# Altium PCB Nguon_LM358_PCB.PcbDoc
Units mm, origin at the board's own origin, x right, y up, seen from the top; angles counter-clockwise.
Board outline 123.19 x 49.53 mm, 2 copper layers (Top Layer, Bottom Layer); 29 components, 15 nets, 71 pads, 3 vias.
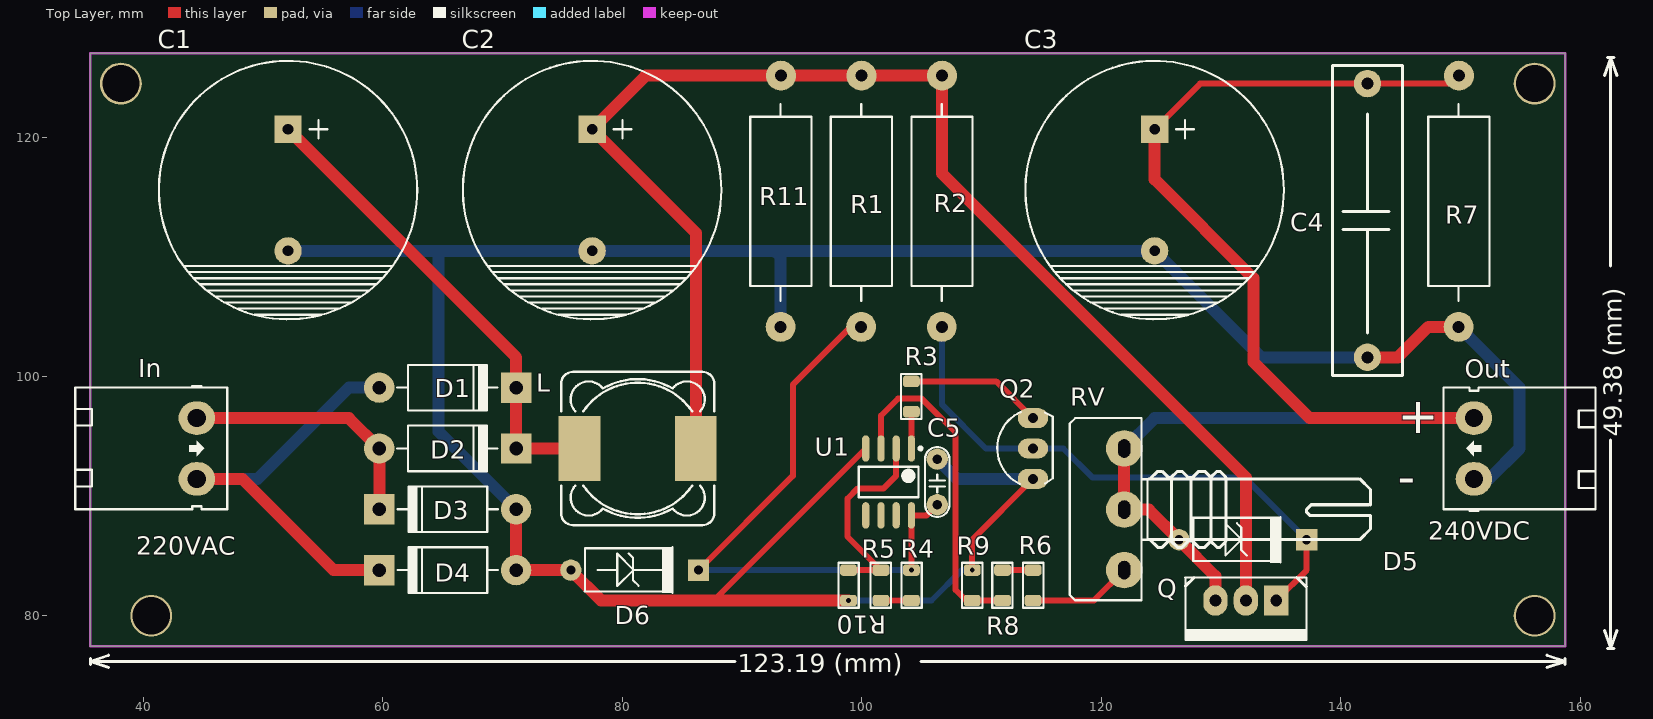
[diagram p0: Top Layer view]
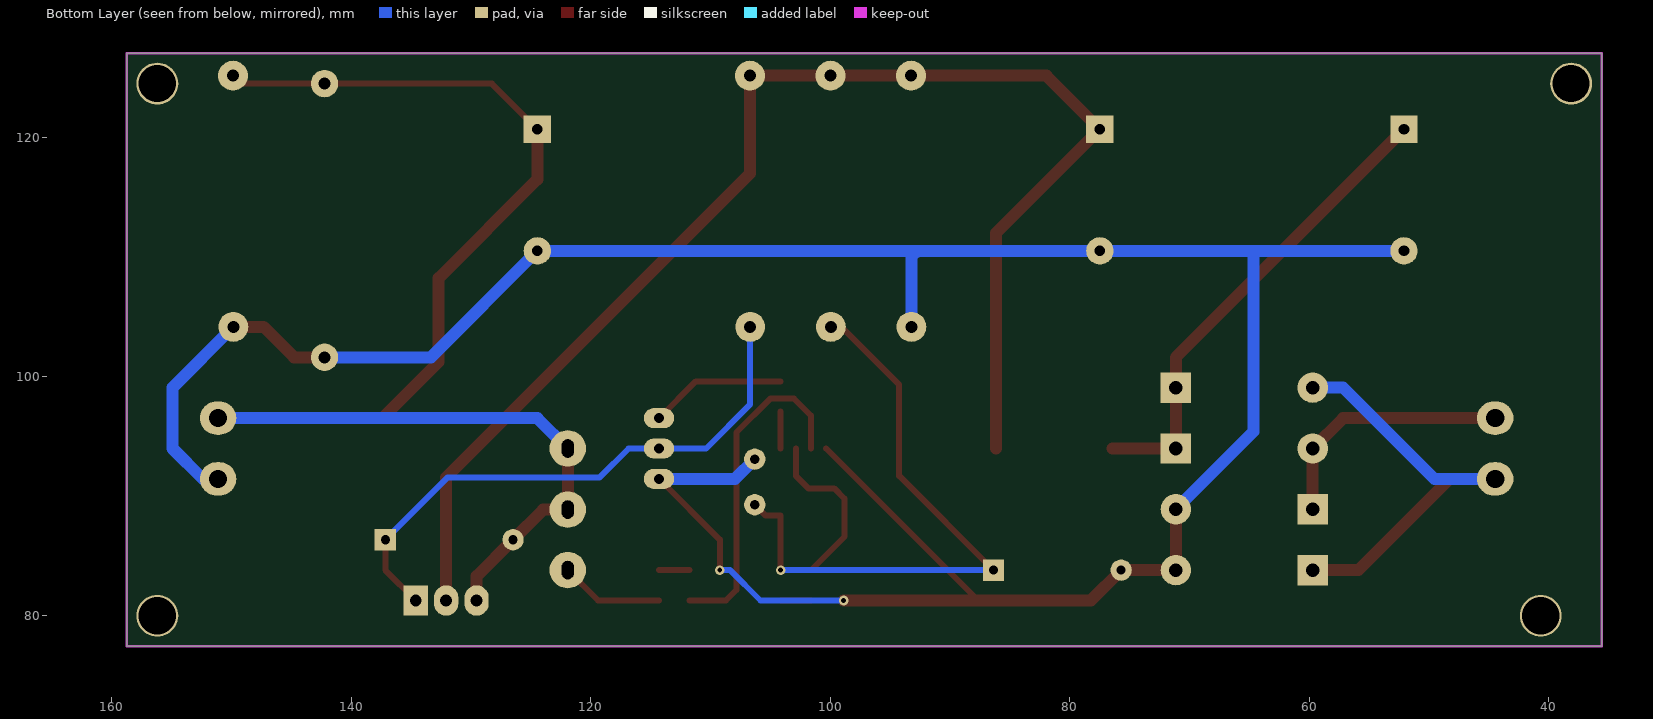
[diagram p1: Bottom Layer view, seen from below]
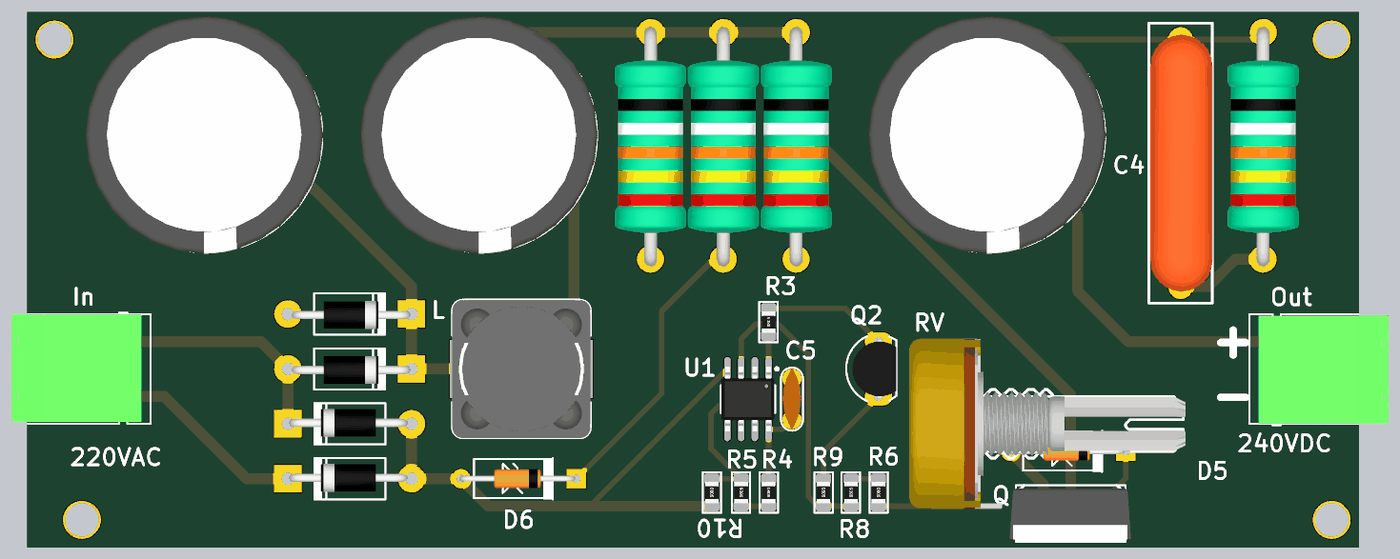
[diagram p2: 3D render of the assembled board from above, using the file's embedded part models]

## Layer stack, top to bottom
Top Solder: solder mask 0.0102, Solder Resist, Dk 3.5
Top Layer: signal copper 0.0356
Dielectric 1: dielectric 0.32, FR-4, Dk 4.8
Bottom Layer: signal copper 0.0356
Bottom Solder: solder mask 0.0102, Solder Resist, Dk 3.5

## Board outline
35.56,77.47 158.75,77.47 158.75,127 35.56,127

## Design rules (kind name [scope] priority, off if disabled: settings)
Clearance [All] p1: gap=0.254 ignorepadtopadclearanceinfootprint=FALSE except(0: Arc-Hole Track-Hole SMDPad-Hole THPad-Hole Via-Hole Fill-Hole Poly-Hole Region-Hole Text-Hole)
PolygonConnect [All] p1: connectstyle=Relief reliefconductorwidth=0.254 reliefentries=4 polygonreliefangle="90 Angle" airgapwidth=0.254
RoutingVias [All] p1: holewidth=0.711 width=1.27 viastyle="Through Hole" minholewidth=0.711 minwidth=1.27 maxholewidth=0.711 maxwidth=1.27
SolderMaskExpansion [All] p1: expansion=0.102
Width [All] p1: maxlimit=2 minlimit=0.254 preferedwidth=0.5
30 further rules are at their usual default settings.

## Components (designator, comment, footprint, x,y, rotation, side; value= is the part's Value field where it differs from the comment)
C1 "Cap Pol" CP4/8.5 52.07,120.65 r270 top value=100pF
C2 "Cap Pol" CP4/8.5 77.47,120.65 r270 top value=100pF
C3 "Cap Pol" CP4/8.5 124.46,120.65 r270 top value=100pF
C4 "0.1uF" "CN - 0.8" 142.24,101.6 r90 top
C5 "Cap" CN1.5 106.299,89.281 r90 top value=105
D1 "Diode" "D2A diode" 71.12,99.06 r180 top
D2 "Diode" "D2A diode" 71.12,93.98 r180 top
D3 "Diode" "D2A diode" 59.69,88.9 r0 top
D4 "Diode" "D2A diode" 59.69,83.82 r0 top
D5 "15V" "Diode Zener" 126.492,86.36 r180 top
D6 "15V" "Diode Zener" 75.692,83.82 r180 top
In "Header 2" HEAD2T 44.45,96.52 r270 top
L "Inductor" "INDUCTOR 12.5x12.5" 81.28,93.98 r0 top value=10mH
Out "Header 2" HEAD2T 151.13,91.44 r90 top
Q "IRF840" QTO-220 134.62,81.28 r180 top
Q2 "13003" QTO-92 114.3,93.98 r90 top value=C1815
R1 "#NAME?" R2W 99.949,104.14 r90 top
R2 "#NAME?" R2W 106.68,104.14 r90 top
R3 "#NAME?" SM-0805 104.14,98.323 r90 top
R4 "#NAME?" SM-0805 104.14,82.55 r270 top
R5 "#NAME?" SM-0805 101.6,82.55 r90 top
R6 "#NAME?" SM-0805 114.3,82.55 r270 top
R7 "#NAME?" R2W 149.86,104.14 r90 top
R8 "#NAME?" SM-0805 111.76,82.55 r90 top
R9 "#NAME?" SM-0805 109.22,82.55 r270 top
R10 "#NAME?" SM-0805 98.882,82.55 r270 top
R11 "#NAME?" R2W 93.218,104.14 r90 top
RV "10k" "RVar 1" 121.92,83.82 r90 top
U1 "LM358" "SOIC 8N" 104.14,93.98 r270 top

## Footprints (in the part's own frame and the unit in brackets; to place one, negate y for a bottom-side part, rotate by r counter-clockwise, add the part's x,y. Pads: shape width x height; smd on the part's side, far side on the other; paste and mask are expansions set on the pad)
CN1.5 [mil]
  round 70 hole 31: 1(0,0) 2(150,0)
  silkscreen extent -40,-40 190,40, body extent -40,-33 190,33, height 235
"CN - 0.8" [mil] "105uF 400V 800mil"
  round 90 hole 39.37: 1(0,0) 2(900,0)
  silkscreen extent -60,-115 960,115, body extent -18,-116 918,110, height 78
CP4/8.5 [mil] "Tu hoa 4700uF/50V"
  rect 90x90 hole 35: 1(0,0)
  round 90 hole 35: 2(400,0)
  silkscreen extent -225,-425 625,425, body extent -236,-438 630,428, height 984
"D2A diode" [mil] "Diode 2A, W 150mil, L 450mil"
  round 100 hole 45: 1(450,0)
  rect 100x100 hole 45: 2(0,0)
  silkscreen extent 61,-75 391,75, body extent 5,-47 435,54, height 100
"Diode Zener" [mil] "Diode 2A, W 150mil, L 450mil"
  round 70 hole 30: 1(0,0)
  rect 70x70 hole 30: 2(-420,0)
  silkscreen extent -335,-75 -46,75, body extent -415,-35 5,34, height 84
HEAD2T [mil] "Header 2, 2 pin, hight 300mil, Pin to Pin 200, Colour Green"
  oval 110x120 hole 60: 1(0,0) 2(200,0)
  silkscreen extent -105,-400 300,100, body extent -100,-406 294,66, height 334
"INDUCTOR 12.5x12.5" [mm] "SMD Inductor  Body Width 12.5mm Body Lenght 12.5mm Height 8mm"
  rect 3.5x5.4 smd: 1(-4.85,0) 2(4.85,0)
  silkscreen extent -6.4,-6.4 6.4,6.4, body extent -6.4,-6.4 6.4,6.4, height 8
QTO-92 [mil] "TO-92"
  oval 66x100 hole 32: 1(-100,0) 2(0,0) 3(100,0)
  silkscreen extent -117,-65 120,118, body extent -109,-66 109,95, height 385
QTO-220 [mil] "TO-220 - 1-2-3"
  rect 80x100 hole 39: 1(0,0)
  oval 80x100 hole 39: 2(100,0) 3(200,0)
  silkscreen extent -100,-76 300,130, body extent -119,-64 322,121, height 905
R2W [mm] "R2W, 2 pin, 700mil"
  round 2.5 hole 1: 1(0,0) 2(20.98,-0.025)
  silkscreen extent 2.18,-2.57 18.62,2.54, body extent -0.69,-3.3 21.51,3.3, height 7.54
"RVar 1" [mil]
  round 120 hole 40 slot 60 at 0 deg: 1(0,0) 2(199,0) 3(400,0)
  silkscreen extent -99,-810 500,179, body extent -110,-818 510,188, height 839
SM-0805 [mm]
  rrect50% 0.95x1.4 smd mask+0.05: 1(-1.27,0) 2(1.27,0)
  silkscreen extent -1.88,-0.84 1.88,0.86, body extent -1,-0.62 1,0.63, height 0.6
"SOIC 8N" [mm] "SOIC 8 pins Normal"
  oval 2.2x0.6 smd: 1(0,0) 2(0,-1.27) 3(0,-2.54) 4(0,-3.81) 5(5.588,-3.81) 6(5.588,-2.54) 7(5.588,-1.27) 8(5.588,0)
  silkscreen extent -0.12,-4.41 4.06,0.89, body extent -0.21,-4.35 5.79,0.55, height 1.7

## Part data
C1 C2 C3: "Polarized Capacitor (Radial)"
C4: library part "Cap DIP", "Capacitor 0.1uF 275V"
C5: "Capacitor", LatestRevisionDate=17-Jul-2002, LatestRevisionNote="Re-released for DXP Platform.", PackageDescription="Radial Cap, Thru-Hole; 2 Leads; 0.3 in Pin Spacing", PackageReference=RAD-0.3, Published=8-Jun-2000, Publisher="Altium Limited"
D1 D2 D3 D4: "Default Diode", Code_JEDEC=DO-214-AB, LatestRevisionDate=17-Jul-2002, LatestRevisionNote="Re-released for DXP Platform.", PackageDescription="DO-214-AB/SMC; 2 C-Bend Leads; Body 7.9 x 5.9 mm, inc. leads (LxW)", PackageReference=SMC, PackageVersion=Sep-1996, Published=8-Jun-2000, Publisher="Altium Limited"
D5 D6: library part Zener
In Out: "Header, 2-Pin"
Q: "MOSFET N - CHANNEL 500V - 0.75 - 8A - TO-220"
Q2: library part C1815, "NPN 600mW, ECB", =C2383
R1 R2: library part "RES DIP", "RES DIP 10K OHM 5% 1/4W", Manufacturer="Stackpole Electronics Inc.", Manufacturer Part Number=RMCF0805JT10K0, Operating Temperature="-55°C ~ 155°C", Package / Case="0805 (2012 Metric)", Power (Watts)="0.125W, 1/8W", Resistance (Ohms)=100k, Supplier Device Package=0805, Temperature Coefficient=±200ppm/°C, Tolerance=±5%, Category=Resistors, ComponentLink1Description=http://www.seielect.com/Catalog/SEI-RMCF_RMCP.pdf, ComponentLink1URL=http://www.seielect.com/Catalog/SEI-RMCF_RMCP.pdf, Composition="Thick Film", Features="Automotive AEC-Q200", Height="0.026\" (0.65mm)", Number of Terminations=2, Packaging="Tape & Reel (TR)", RoHS="RoHS Compliant", Size / Dimension="0.079\" L x 0.049\" W (2.00mm x 1.25mm)"
R3: library part "RES 0805", "RES SMD 10K OHM 5% 1/8W 0805", Manufacturer="Stackpole Electronics Inc.", Manufacturer Part Number=RMCF0805JT10K0, Operating Temperature="-55°C ~ 155°C", Package / Case="0805 (2012 Metric)", Power (Watts)="0.125W, 1/8W", Resistance (Ohms)=100k, Supplier Device Package=0805, Supplier Part Number 1=RMCF0805JT10K0TR-ND, Temperature Coefficient=±200ppm/°C, Tolerance=±5%, Category=Resistors, ComponentLink1Description=http://www.seielect.com/Catalog/SEI-RMCF_RMCP.pdf, ComponentLink1URL=http://www.seielect.com/Catalog/SEI-RMCF_RMCP.pdf, Composition="Thick Film", Features="Automotive AEC-Q200", Height="0.026\" (0.65mm)", Number of Terminations=2, Packaging="Tape & Reel (TR)", Pricing 1="5000=0.0019, 10000=0.00165, 25000=0.00145, 50000=0.00133, 125000=0.0013 (USD)", RoHS="RoHS Compliant", Size / Dimension="0.079\" L x 0.049\" W (2.00mm x 1.25mm)", Stock 1=965000, Supplier 1=Digi-Key
R4 R5: library part "RES 0805", "RES SMD 10K OHM 5% 1/8W 0805", Manufacturer="Stackpole Electronics Inc.", Manufacturer Part Number=RMCF0805JT10K0, Operating Temperature="-55°C ~ 155°C", Package / Case="0805 (2012 Metric)", Power (Watts)="0.125W, 1/8W", Resistance (Ohms)=120k, Supplier Device Package=0805, Supplier Part Number 1=RMCF0805JT10K0TR-ND, Temperature Coefficient=±200ppm/°C, Tolerance=±5%, Category=Resistors, ComponentLink1Description=http://www.seielect.com/Catalog/SEI-RMCF_RMCP.pdf, ComponentLink1URL=http://www.seielect.com/Catalog/SEI-RMCF_RMCP.pdf, Composition="Thick Film", Features="Automotive AEC-Q200", Height="0.026\" (0.65mm)", Number of Terminations=2, Packaging="Tape & Reel (TR)", Pricing 1="5000=0.0019, 10000=0.00165, 25000=0.00145, 50000=0.00133, 125000=0.0013 (USD)", RoHS="RoHS Compliant", Size / Dimension="0.079\" L x 0.049\" W (2.00mm x 1.25mm)", Stock 1=965000, Supplier 1=Digi-Key
R6: library part "RES 0805", "RES SMD 10K OHM 5% 1/8W 0805", Manufacturer="Stackpole Electronics Inc.", Manufacturer Part Number=RMCF0805JT10K0, Operating Temperature="-55°C ~ 155°C", Package / Case="0805 (2012 Metric)", Power (Watts)="0.125W, 1/8W", Resistance (Ohms)=220k, Supplier Device Package=0805, Supplier Part Number 1=RMCF0805JT10K0TR-ND, Temperature Coefficient=±200ppm/°C, Tolerance=±5%, Category=Resistors, ComponentLink1Description=http://www.seielect.com/Catalog/SEI-RMCF_RMCP.pdf, ComponentLink1URL=http://www.seielect.com/Catalog/SEI-RMCF_RMCP.pdf, Composition="Thick Film", Features="Automotive AEC-Q200", Height="0.026\" (0.65mm)", Number of Terminations=2, Packaging="Tape & Reel (TR)", Pricing 1="5000=0.0019, 10000=0.00165, 25000=0.00145, 50000=0.00133, 125000=0.0013 (USD)", RoHS="RoHS Compliant", Size / Dimension="0.079\" L x 0.049\" W (2.00mm x 1.25mm)", Stock 1=965000, Supplier 1=Digi-Key
R7 R11: library part "RES DIP", "RES DIP 10K OHM 5% 1/4W", Manufacturer="Stackpole Electronics Inc.", Manufacturer Part Number=RMCF0805JT10K0, Operating Temperature="-55°C ~ 155°C", Package / Case="0805 (2012 Metric)", Power (Watts)="0.125W, 1/8W", Resistance (Ohms)=220k, Supplier Device Package=0805, Temperature Coefficient=±200ppm/°C, Tolerance=±5%, Category=Resistors, ComponentLink1Description=http://www.seielect.com/Catalog/SEI-RMCF_RMCP.pdf, ComponentLink1URL=http://www.seielect.com/Catalog/SEI-RMCF_RMCP.pdf, Composition="Thick Film", Features="Automotive AEC-Q200", Height="0.026\" (0.65mm)", Number of Terminations=2, Packaging="Tape & Reel (TR)", RoHS="RoHS Compliant", Size / Dimension="0.079\" L x 0.049\" W (2.00mm x 1.25mm)"
R8: library part "RES 0805", "RES SMD 10K OHM 5% 1/8W 0805", Manufacturer="Stackpole Electronics Inc.", Manufacturer Part Number=RMCF0805JT10K0, Operating Temperature="-55°C ~ 155°C", Package / Case="0805 (2012 Metric)", Power (Watts)="0.125W, 1/8W", Resistance (Ohms)=180k, Supplier Device Package=0805, Supplier Part Number 1=RMCF0805JT10K0TR-ND, Temperature Coefficient=±200ppm/°C, Tolerance=±5%, Category=Resistors, ComponentLink1Description=http://www.seielect.com/Catalog/SEI-RMCF_RMCP.pdf, ComponentLink1URL=http://www.seielect.com/Catalog/SEI-RMCF_RMCP.pdf, Composition="Thick Film", Features="Automotive AEC-Q200", Height="0.026\" (0.65mm)", Number of Terminations=2, Packaging="Tape & Reel (TR)", Pricing 1="5000=0.0019, 10000=0.00165, 25000=0.00145, 50000=0.00133, 125000=0.0013 (USD)", RoHS="RoHS Compliant", Size / Dimension="0.079\" L x 0.049\" W (2.00mm x 1.25mm)", Stock 1=965000, Supplier 1=Digi-Key
R9: library part "RES 0805", "RES SMD 10K OHM 5% 1/8W 0805", Manufacturer="Stackpole Electronics Inc.", Manufacturer Part Number=RMCF0805JT10K0, Operating Temperature="-55°C ~ 155°C", Package / Case="0805 (2012 Metric)", Power (Watts)="0.125W, 1/8W", Resistance (Ohms)=1k, Supplier Device Package=0805, Supplier Part Number 1=RMCF0805JT10K0TR-ND, Temperature Coefficient=±200ppm/°C, Tolerance=±5%, Category=Resistors, ComponentLink1Description=http://www.seielect.com/Catalog/SEI-RMCF_RMCP.pdf, ComponentLink1URL=http://www.seielect.com/Catalog/SEI-RMCF_RMCP.pdf, Composition="Thick Film", Features="Automotive AEC-Q200", Height="0.026\" (0.65mm)", Number of Terminations=2, Packaging="Tape & Reel (TR)", Pricing 1="5000=0.0019, 10000=0.00165, 25000=0.00145, 50000=0.00133, 125000=0.0013 (USD)", RoHS="RoHS Compliant", Size / Dimension="0.079\" L x 0.049\" W (2.00mm x 1.25mm)", Stock 1=965000, Supplier 1=Digi-Key
R10: library part "RES 0805", "RES SMD 10K OHM 5% 1/8W 0805", Manufacturer="Stackpole Electronics Inc.", Manufacturer Part Number=RMCF0805JT10K0, Operating Temperature="-55°C ~ 155°C", Package / Case="0805 (2012 Metric)", Power (Watts)="0.125W, 1/8W", Resistance (Ohms)=10k, Supplier Device Package=0805, Supplier Part Number 1=RMCF0805JT10K0TR-ND, Temperature Coefficient=±200ppm/°C, Tolerance=±5%, Category=Resistors, ComponentLink1Description=http://www.seielect.com/Catalog/SEI-RMCF_RMCP.pdf, ComponentLink1URL=http://www.seielect.com/Catalog/SEI-RMCF_RMCP.pdf, Composition="Thick Film", Features="Automotive AEC-Q200", Height="0.026\" (0.65mm)", Number of Terminations=2, Packaging="Tape & Reel (TR)", Pricing 1="5000=0.0019, 10000=0.00165, 25000=0.00145, 50000=0.00133, 125000=0.0013 (USD)", RoHS="RoHS Compliant", Size / Dimension="0.079\" L x 0.049\" W (2.00mm x 1.25mm)", Stock 1=965000, Supplier 1=Digi-Key
RV: library part "Res POT", "Variable Resistor", LatestRevisionDate=17-Jul-2002, LatestRevisionNote="Re-released for DXP Platform.", PackageReference=VR5, Published=8-Jun-2000, Publisher="Altium Limited", Set Position=0.5, Sim Note="Enter the Resistance value and the set point into parameter fields."
U1: "Low-Power Dual Operational Amplifier"

## Free pads (board coordinates)
  round 3.5 hole 3.1: 2(38.1,124.46) 3(40.64,80.01) 4(156.21,80.01) 5(156.21,124.46)

## Via types
v1: diameter 0.8, hole 0.4, Top Layer to Bottom Layer, 3 vias

## Nets (pads, with @x,y where several pads share a name; then routed paths per layer and width w, separated by ;. In a path a pad name is that pad's centre, name@x,y a point inside that pad or via, vN(x,y) a via of type N, cw(c..) or ccw(c..) an arc to the next point about the centre after c; other vN are vias at no path point)
GND: C1.2 C2.2 C3.2 C4.1 C5.2 D3.1 D4.1 D6.1 Out.1 Q2.1 R7.1 R9.1 R10.2 R11.1 U1.4 | length 231.8
  Top Layer w0.5: 87.884,81.534 U1.4 ; v1(109.22,83.82) 109.22,86.36 Q2.1
  Top Layer w1: D3.1 D4.1 D6.1 78.232,81.28 v1(98.882,81.28) ; C4.1 144.78,101.6 147.32,104.14 R7.1
  Bottom Layer w0.5: v1(98.882,81.28) 105.816,81.28 108.356,83.82 v1(109.22,83.82)
  Bottom Layer w1: C1.2 64.643,110.49 ; D3.1 64.643,95.377 64.643,110.49 ; R11.1 93.218,109.982 92.71,110.49 ; C5.2 107.95,91.44 Q2.1 ; C4.1 133.35,101.6 C3.2 92.71,110.49 ; R7.1 154.94,99.06 154.94,93.98 152.4,91.44 Out.1 ; 64.643,110.49 C2.2 92.71,110.49
NetC1_1: C1.1 D1.2 D2.2 L.1 | length 39.9
  Top Layer w1: C1.1 71.12,101.6 D1.2 D2.2 L.1
NetC2_1: C2.1 L.2 Q.2 R1.2 R2.2 R11.2 | length 115.7
  Top Layer w1: L.2 86.13,111.99 C2.1 81.94,125.12 R11.2 R1.2 R2.2 106.705,116.942 132.08,91.567 Q.2
NetC3_1: C3.1 C4.2 D5.1 Out.2 Q.3 R7.2 RV.2 RV.3 | length 117.8
  Top Layer w0.5: C3.1 128.27,124.46 C4.2 149.225,124.46 R7.2
  Top Layer w1: RV.3 RV.2 123.977,88.875 D5.1 129.54,83.312 Q.3 ; C3.1 124.46,116.459 132.715,108.204 132.715,101.219 137.414,96.52 Out.2
  Bottom Layer w1: RV.3 124.46,96.52 Out.2
NetC5_1: C5.1 D6.2 R1.1 R4.1 U1.8 | length 50.5
  Top Layer w0.5: D6.2 94.234,91.694 94.234,99.314 R1.1@99.06,104.14 ; v1(104.14,83.82) U1.8 105.41,88.392 C5.1
  Bottom Layer w0.5: D6.2 v1(104.14,83.82)
NetD1_1: D1.1 D4.2 In.2 | length 36.8
  Top Layer w1: In.2 48.26,91.44 55.88,83.82 D4.2
  Bottom Layer w1: In.2 49.53,91.44 57.15,99.06 D1.1
NetD2_1: D2.1 D3.2 In.1 | length 21.4
  Top Layer w1: In.1 57.15,96.52 D2.1 D3.2
NetD5_2: D5.2 Q2.2 Q.1 R2.1 | length 47.8
  Top Layer w0.5: Q.1 137.16,83.82 D5.2
  Bottom Layer w0.5: R2.1 106.68,97.663 110.363,93.98 Q2.2 116.84,93.98 119.253,91.567 131.953,91.567 D5.2
NetQ2_3: Q2.3 R3.2 | length 11.4
  Top Layer w0.5: R3.2 111.227,99.593 Q2.3
NetR3_1: R3.1 U1.1 | length 3.1
  Top Layer w0.5: U1.1 R3.1
NetR4_2: R4.2 R5.1 | length 2.5
  Top Layer w0.5: R5.1 R4.2
NetR5_2: R5.2 R10.1 U1.2 | length 17
  Top Layer w0.5: R10.1 R5.2 98.806,86.614 98.806,89.789 99.67,90.653 101.829,90.653 102.87,91.694 U1.2
NetR6_1: R6.1 R8.2 | length 2.5
  Top Layer w0.5: R8.2 R6.1
NetR6_2: R6.2 RV.1 | length 8.7
  Top Layer w0.5: R6.2 119.38,81.28 RV.1
NetR8_1: R8.1 R9.2 U1.3 | length 28.2
  Top Layer w0.5: U1.3 101.6,96.723 103.022,98.146 105.004,98.146 107.823,95.326 107.823,82.169 108.712,81.28 R9.2 R8.1
pads on no net: U1.5 U1.6 U1.7

## Keep-outs
Keep-Out Layer:
  the board outline again, w0.2

## Silkscreen, mask and mechanical layers (free items; w line width, h text height)
Top Overlay:
  lines w0.254: 35.56,75.946 35.56,76.454 ; 37.084,75.692 35.56,76.2 ; 37.084,76.708 35.56,76.2 ; 89.385,76.2 35.56,76.2 ; 104.925,76.2 158.75,76.2 ; 157.226,75.692 158.75,76.2 ; 157.226,76.708 158.75,76.2 ; 158.75,75.946 158.75,76.454 ; 162.052,78.792 162.56,77.268 ; 162.052,125.124 162.56,126.648 ; 162.306,77.268 162.814,77.268 ; 162.306,126.648 162.814,126.648 ; 162.56,94.696 162.56,77.268 ; 162.56,109.22 162.56,126.648 ; 163.068,78.792 162.56,77.268 ; 163.068,125.124 162.56,126.648
  text "+" at 144.78,95.25 h3
  text "49.38 (mm)" at 163.474,94.95 h1.52 r90
  text "-" at 144.78,90.17 h3
  text "240VDC" at 147.32,86.36 h1.52
  text "220VAC" at 39.37,85.09 h1.52
  text "123.19 (mm)" at 89.639,75.286 h1.52